# Altium PCB mainboard.PCBDOC
Units mm, origin at the board's own origin, x right, y up, seen from the top; angles counter-clockwise.
Board outline 295.53 x 164.72 mm, 2 copper layers (Top Layer, Bottom Layer); 48 components, 69 nets, 273 pads, 6 vias.
Unrouted connection lines stored in the file: 91.
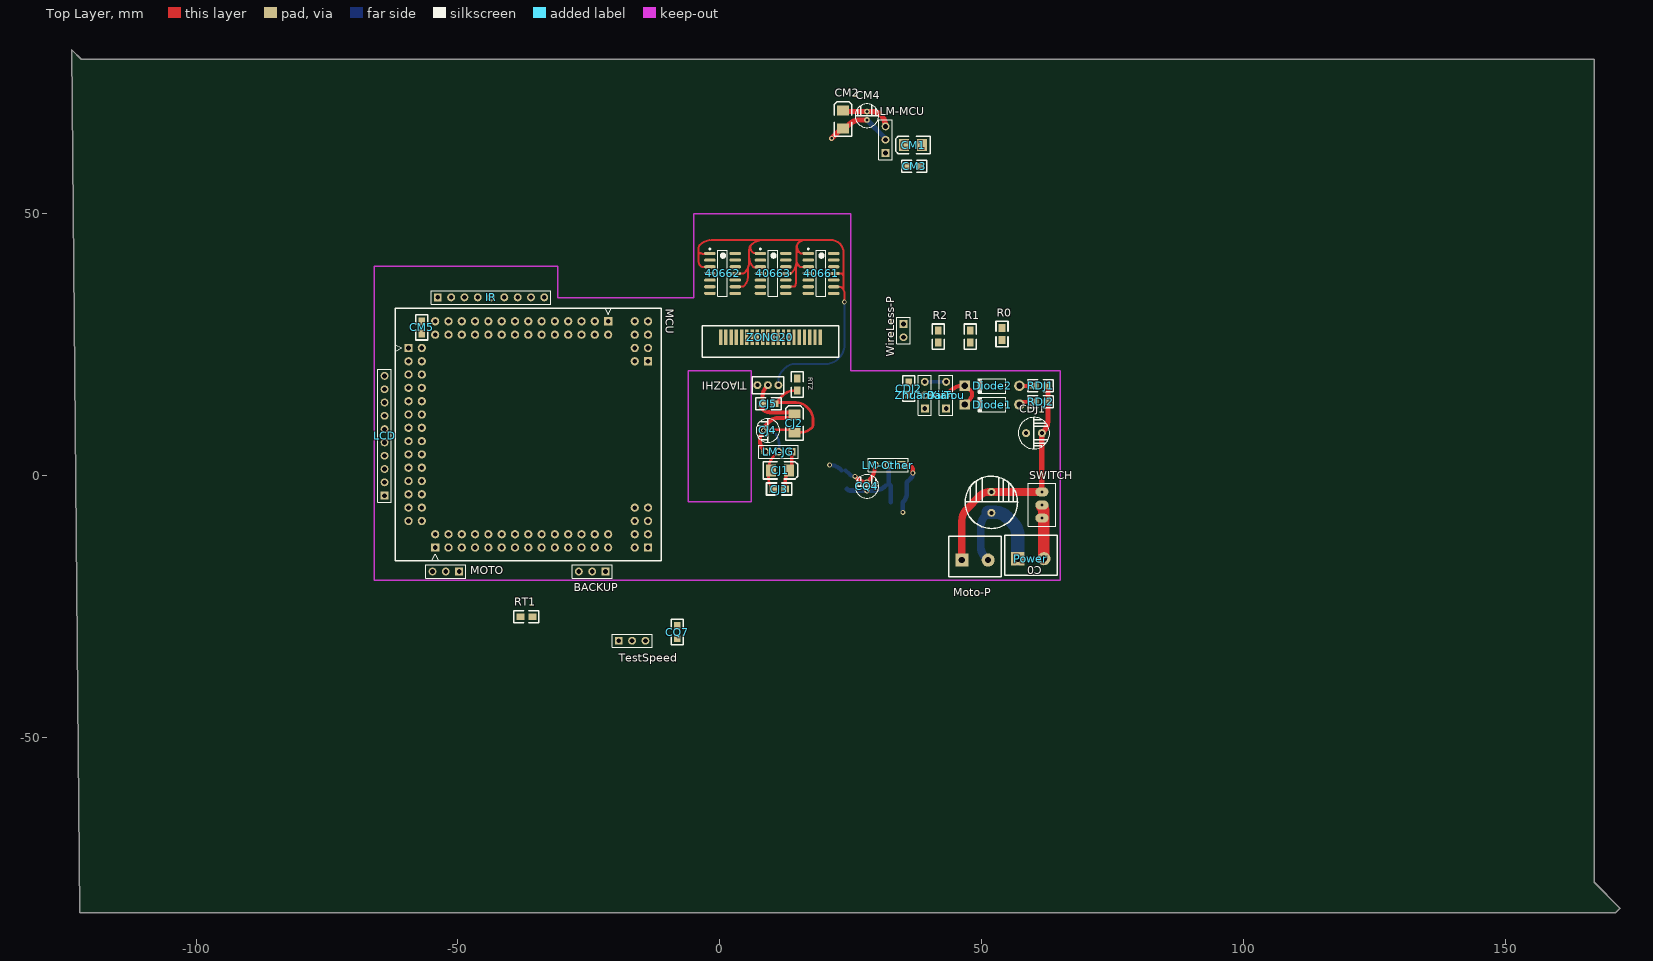
[diagram p0: Top Layer view]
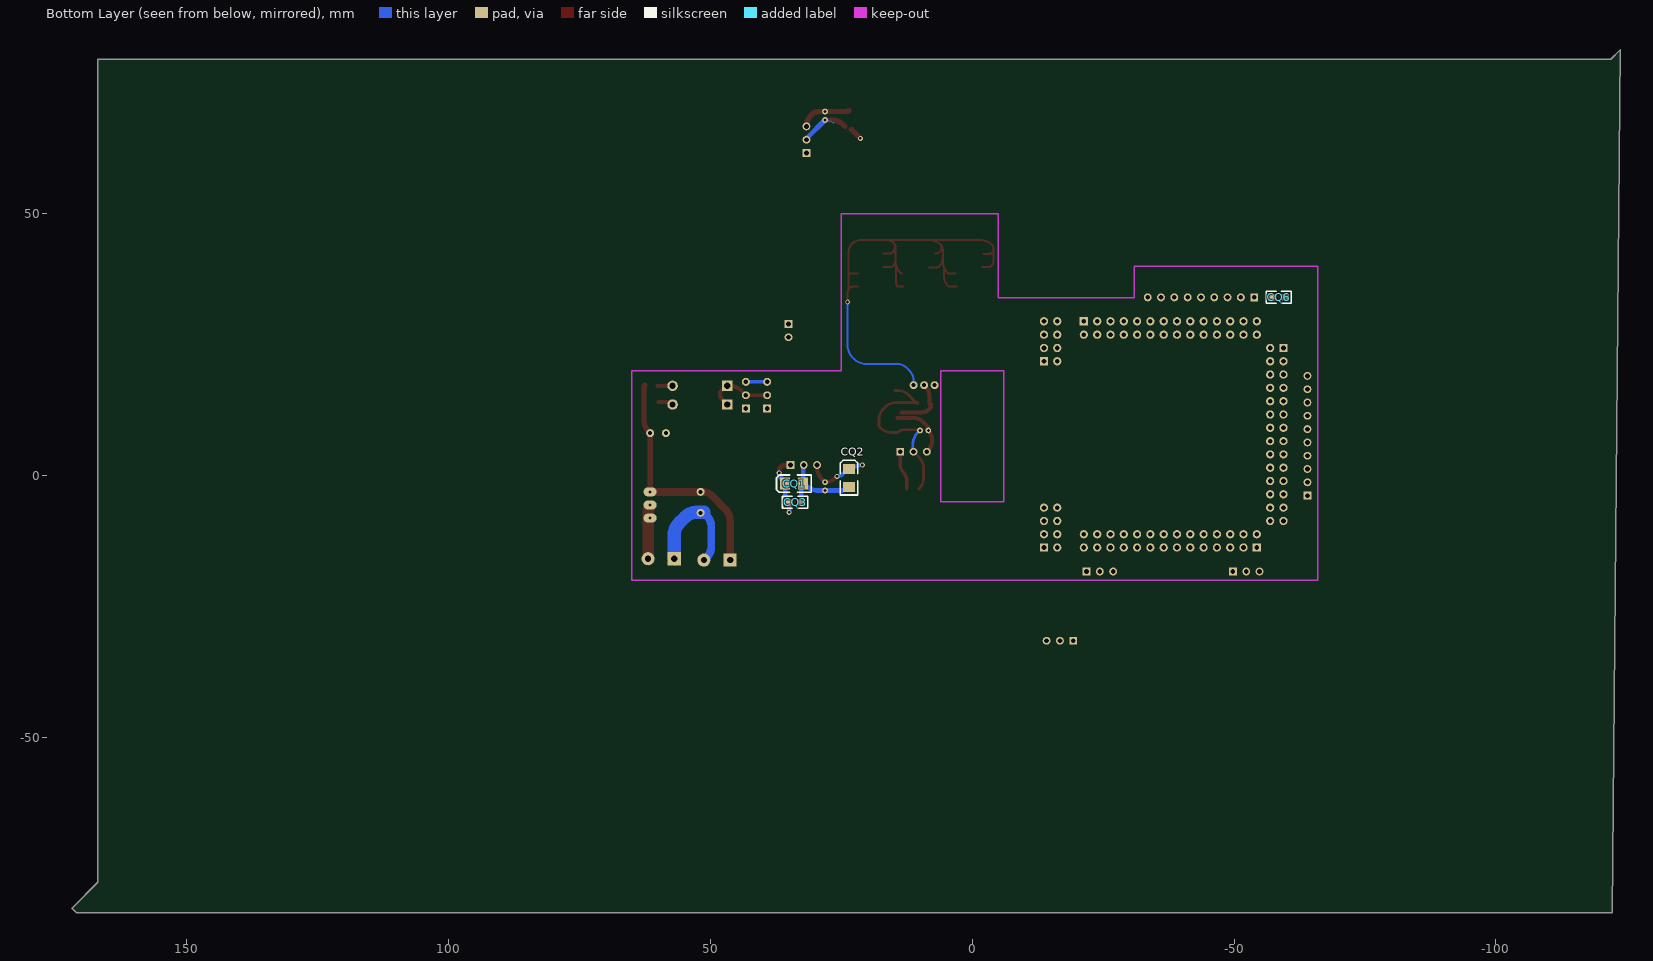
[diagram p1: Bottom Layer view, seen from below]

## Layer stack, top to bottom
Top Layer: signal copper 0.0356
Dielectric: dielectric 0.32, FR-4, Dk 4.8
Bottom Layer: signal copper 0.0356

## Board outline
-122.174,-83.439 170.942,-83.439 171.831,-82.55 166.878,-77.597 166.878,79.502 -121.92,79.502 -123.698,81.28

## Design rules (kind name [scope] priority, off if disabled: settings)
Clearance [All] p1: gap=0.254
ComponentClearance [All] p1 off: gap=0.254 collisioncheckmode=3 verticalgap=0.254
PolygonConnect [All] p1: connectstyle=Relief reliefconductorwidth=0.254 reliefentries=4 polygonreliefangle="90 Angle"
RoutingVias [All] p1: holewidth=0.711 width=1.27 viastyle="Through Hole" minholewidth=0.5 minwidth=0.7 maxholewidth=0.711 maxwidth=1.27
SolderMaskExpansion [All] p1: expansion=0.102
TestPointUsage [All] p1: valid=0 allowmultiple=FALSE
Testpoint [All] p1: side=15 testpointundercomponent=TRUE minsize=1.016 maxsize=2.54 preferedsize=1.524 minholesize=0 maxholesize=1.016 preferedholesize=0.813 testpointgrid=0.025 style=1023 order=0-112345678
Width [All] p1: maxlimit=2.5 minlimit=0.254 preferedwidth=0.254 toplayer_prefwidth=0.508 bottomlayer_prefwidth=0.508 minimp=50.000000 maximp=50.000000 favimp=50.000000
18 further rules are at their usual default settings.

## Classes and differential pairs
component class MCU: MCU
component class mainboard: BACKUP BaiTou C0 CDJ1 CDJ2 CJ1 CJ2 CJ3 CJ4 CJ5 CM1 CM2 CM3 CM4 CM5 CQ1 CQ2 CQ3 CQ4 CQ6 CQ7 Diode1 Diode2 IR LCD LM-JG LM-MCU LM-Other MOTO Moto-P Power R0 R1 R2 RDJ1 RDJ2 RT1 SWITCH TestSpeed WireLess-P ZhuanXian ZONG20
component class Control: 40661 40662 40663 RTZ TIAOZHI

## Components (designator, comment, footprint, x,y, rotation, side; value= is the part's Value field where it differs from the comment)
40661 "Header 7X2A" 4066SOP 19.304,38.608 r0 top
40662 "Header 7X2A" 4066SOP 0.508,38.608 r0 top
40663 "Header 7X2A" 4066SOP 10.16,38.608 r0 top
BACKUP "Header 3" HDR1X3 -21.844,-18.288 r180 top
BaiTou "激光摆头舵机接口" HDR1X3 43.18,12.827 r90 top
C0 "BATT" 1000UF 51.816,-5.08 r270 top
CDJ1 "100uF" 100UF 59.944,8.128 r180 top
CDJ2 "Cap" 0805 36.068,17.78 r270 top
CJ1 "Cap Pol3" 3528 13.208,1.016 r0 top
CJ2 "47uF" 3528 14.224,11.684 r90 top
CJ3 "Cap" 0805 10.16,-2.54 r0 top
CJ4 "47uF" 47UF 9.144,8.636 r0 top
CJ5 "Cap" 0805 8.128,13.716 r0 top
CM1 "Cap Pol3" 3528 35.179,63.119 r180 top
CM2 "47uF" 3528 23.495,69.723 r90 top
CM3 "Cap" 0805 38.227,59.055 r180 top
CM4 "47uF" 47UF 28.067,68.707 r270 top
CM5 "Cap" 0805 -56.896,29.464 r270 top
CQ1 "Cap Pol3" 3528 35.687,-1.524 r0 bottom
CQ2 "47uF" 3528 23.495,1.27 r90 bottom
CQ3 "Cap" 0805 32.639,-5.08 r0 bottom
CQ4 "47uF" 47UF 28.067,-2.032 r270 top
CQ6 "Cap" 0805 -57.404,34.036 r180 bottom
CQ7 "Cap" 0805 -8.128,-30.988 r90 top
Diode1 "Diode 1N4001" DO-41 51.943,13.589 r180 top
Diode2 "Diode 1N4001" DO-41 51.943,17.145 r180 top
IR "红外模块接口" HDR1X9 -53.848,34.036 r0 top
LCD "LCD显示接口" HDR1X10 -64.008,-3.81 r90 top
LM-JG "激光供电模块" HDR1X3 13.716,4.572 r180 top
LM-MCU "单片机供电模块" HDR1X3 31.623,61.595 r90 top
LM-Other "其他供电模块" HDR1X3 34.671,2.032 r180 top
MCU "龙丘单片机" LQ_112_BOARD -59.436,24.384 r0 top
MOTO "电机模块" HDR1X3 -49.784,-18.288 r180 top
Moto-P "电机电源" tongzhu 43.688,-19.304 r0 top
Power "电源" tongzhu 54.356,-19.05 r0 top
R0 "0欧姆" 0805 53.848,25.908 r90 top
R1 "0欧姆" 0805 47.752,25.4 r90 top
R2 "0欧姆" 0805 41.656,25.4 r90 top
RDJ1 "6欧姆" 0805 60.071,17.145 r0 top
RDJ2 "6欧姆" 0805 60.071,14.097 r0 top
RT1 "测速电阻" 0805 -38.1,-26.924 r0 top
RTZ "TIAO" 0805 14.732,16.256 r90 top
SWITCH "SWITCH" SWITCH 61.468,-5.588 r90 top
TestSpeed "测速模块" HDR1X3 -19.304,-31.496 r0 top
TIAOZHI "Header 3" TIAOZHI 9.144,17.272 r180 top
WireLess-P "无线电源模块" HDR1X2 35.052,28.956 r270 top
ZhuanXian "摆角舵机" HDR1X3 39.116,12.827 r90 top
ZONG20 "Header 20" ZONG20 9.144,26.416 r0 top

## Footprints (in the part's own frame and the unit in brackets; to place one, negate y for a bottom-side part, rotate by r counter-clockwise, add the part's x,y. Pads: shape width x height; smd on the part's side, far side on the other; paste and mask are expansions set on the pad)
47UF [mm]
  round 1.1 hole 0.6: 1(-0.8,0) 2(0.8,0)
  silkscreen extent -2.25,-2.25 2.25,2.25
100UF [mil]
  round 60 hole 30: 1(-59.06,0) 2(59.06,0)
  silkscreen extent -118,-118 118,118
0805 [mil]
  rect 60x50 smd: 1(0,0) 2(90,0)
  silkscreen extent -50,-45 140,45
1000UF [mil]
  round 60 hole 30: 1(-78.74,0) 2(78.74,0)
  silkscreen extent -197,-197 197,197
3528 [mil]
  rect 75x90 smd: 1(0,0) 2(-135,0)
  silkscreen extent -195,-65 65,65
4066SOP [mm] "SOP, 14-Leads, Body 8.8x4.0mm (max), Pitch 1.27mm, IPC Medium Density"
  oval 2.2x0.6 smd: 1(-2.425,3.81) 2(-2.425,2.54) 3(-2.425,1.27) 4(-2.425,0) 5(-2.425,-1.27) 6(-2.425,-2.54) 7(-2.425,-3.81) 8(2.425,-3.81) 9(2.425,-2.54) 10(2.425,-1.27) 11(2.425,0) 12(2.425,1.27) 13(2.425,2.54) 14(2.425,3.81)
  silkscreen extent -2.55,-4.4 0.93,4.78
DO-41 [mm] "Diode, Axial; Body 5.2 x 2.7 mm (LxDia. max), Lead Dia. 0.86 mm (max)"
  round 2 hole 1.2: 1(-5.23,0)
  rect 2x2 hole 1.2: 2(5.23,0)
  silkscreen extent -2.65,-1.42 2.75,1.4
HDR1X2 [mm] "Connector; Header; 2 Position"
  rect 1.5x1.5 hole 0.9: 1(0,0)
  round 1.5 hole 0.9: 2(2.54,0)
  silkscreen extent -1.27,-1.27 3.81,1.27
HDR1X3 [mm] "Connector; Header; 3 Position"
  rect 1.5x1.5 hole 0.9: 1(0,0)
  round 1.5 hole 0.9: 2(2.54,0) 3(5.08,0)
  silkscreen extent -1.27,-1.27 6.35,1.27
HDR1X9 [mm] "Connector; Header; 9 Position"
  rect 1.5x1.5 hole 0.9: 1(0,0)
  round 1.5 hole 0.9: 2(2.54,0) 3(5.08,0) 4(7.62,0) 5(10.16,0) 6(12.7,0) 7(15.24,0) 8(17.78,0) 9(20.32,0)
  silkscreen extent -1.27,-1.27 21.59,1.27
HDR1X10 [mm] "Connector; Header; 10 Position"
  rect 1.5x1.5 hole 0.9: 1(0,0)
  round 1.5 hole 0.9: 2(2.54,0) 3(5.08,0) 4(7.62,0) 5(10.16,0) 6(12.7,0) 7(15.24,0) 8(17.78,0) 9(20.32,0) 10(22.86,0)
  silkscreen extent -1.27,-1.27 24.13,1.27
LQ_112_BOARD [mil]
  rect 62x62 hole 35: 101(200,-1500) 201(0,0) 301(1500,200) 401(1800,-1500) 501(1800,-100)
  round 62 hole 35: 102(200,-1400) 103(300,-1500) 104(300,-1400) 105(400,-1500) 106(400,-1400) 107(500,-1500) 108(500,-1400) 109(600,-1500) 110(600,-1400) 111(700,-1500) 112(700,-1400) 113(800,-1500) 114(800,-1400) 115(900,-1500) 116(900,-1400) 117(1000,-1500) 118(1000,-1400) 119(1100,-1500) 120(1100,-1400) 121(1200,-1500) 122(1200,-1400) 123(1300,-1500) 124(1300,-1400) 125(1400,-1500) 126(1400,-1400) 127(1500,-1500) 128(1500,-1400) 202(100,0) 203(0,-100) 204(100,-100) 205(0,-200) 206(100,-200) 207(0,-300) 208(100,-300) 209(0,-400) 210(100,-400) 211(0,-500) 212(100,-500) 213(0,-600) 214(100,-600) 215(0,-700) 216(100,-700) 217(0,-800) 218(100,-800) 219(0,-900) 220(100,-900) 221(0,-1000) 222(100,-1000) 223(0,-1100) 224(100,-1100) 225(0,-1200) 226(100,-1200) 227(0,-1300) 228(100,-1300) 302(1500,100) 303(1400,200) 304(1400,100) 305(1300,200) 306(1300,100) 307(1200,200) 308(1200,100) 309(1100,200) 310(1100,100) 311(1000,200) 312(1000,100) 313(900,200) 314(900,100) 315(800,200) 316(800,100) 317(700,200) 318(700,100) 319(600,200) 320(600,100) 321(500,200) 322(500,100) 323(400,200) 324(400,100) 325(300,200) 326(300,100) 327(200,200) 328(200,100) 402(1700,-1500) 403(1800,-1400) 404(1700,-1400) 405(1800,-1300) 406(1700,-1300) 407(1800,-1200) 408(1700,-1200) 502(1700,-100) 503(1800,0) 504(1700,0) 505(1800,100) 506(1700,100) 507(1800,200) 508(1700,200)
  silkscreen extent -100,-1600 1900,300
SWITCH [mm]
  oval 1.7x2.5 hole 0.6: 1(-2.5,0) 2(0,0) 3(2.5,0)
  silkscreen extent -4.1,-2.6 4.1,2.6
TIAOZHI [mil]
  round 60 hole 30: 1(-78.74,0) 2(0,0) 3(78.74,0)
  silkscreen extent -118,-65 118,65
tongzhu [mm]
  rect 2.5x2.5 hole 1.2: 1(2.5,3.2)
  round 2.5 hole 1.2: 2(7.5,3.2)
  silkscreen extent 0,0 10,7.7
ZONG20 [mm]
  rect 0.65x3 smd: 1(-9,0) 2(-8,0) 3(-7,0) 4(-6,0) 5(-5,0) 6(-4,0) 7(-3,0) 8(-2,0) 9(-1,0) 10(0,0) 11(1,0) 12(2,0) 13(3,0) 14(4,0) 15(5,0) 16(6,0) 17(7,0) 18(8,0) 19(9,0) 20(10,0)
  silkscreen extent -12.5,-3.8 13.5,2.2

## Part data
40661 40662 40663: "40661"
BACKUP: "备用"
BaiTou LM-JG LM-MCU LM-Other MOTO SWITCH TestSpeed ZhuanXian: library part "Header 3", "Header, 3-Pin"
C0: library part "Cap Pol3", "Polarized Capacitor (Surface Mount)"
CDJ1 CJ2 CM2 CQ2: library part "Cap Pol1", "Polarized Capacitor (Radial)"
CDJ2 CJ3 CJ5 CM3 CM5 CQ3 CQ6 CQ7: "Capacitor"
CJ1 CM1 CQ1: "Polarized Capacitor (Surface Mount)"
CJ4 CM4 CQ4: library part Cap, "Capacitor"
Diode1 Diode2: "1 Amp General Purpose Rectifier"
IR: library part "Header 9", "Header, 9-Pin"
LCD: library part "Header 10", "Header, 10-Pin"
MCU: library part LQ_112_BOARD, "LQ_112_BOARD"
Moto-P Power WireLess-P: library part "Header 2", "Header, 2-Pin"
R0 R1 R2 RDJ1 RDJ2 RT1 RTZ: library part Res2, "Resistor"
TIAOZHI: "Header, 3-Pin"
ZONG20: "传感下来引脚"

## Via types
v1: diameter 0.965, hole 0.508, Top Layer to Bottom Layer, tented bottom, 5 vias
v2: diameter 0.9, hole 0.6, Top Layer to Bottom Layer, 1 vias

## Nets (pads, with @x,y where several pads share a name; then routed paths per layer and width w, separated by ;. In a path a pad name is that pad's centre, name@x,y a point inside that pad or via, vN(x,y) a via of type N, cw(c..) or ccw(c..) an arc to the next point about the centre after c; other vN are vias at no path point)
0: IR.9 MCU.309
1: IR.8 MCU.311
2: IR.7 MCU.313
3: IR.6 MCU.315
4: IR.5 MCU.317
5: IR.4 MCU.319
6: IR.3 MCU.321
8: MCU.310 ZONG20.10
9: MCU.312 ZONG20.9
10: MCU.314 ZONG20.8
11: MCU.316 ZONG20.7
-1: 40661.2 ZONG20.20
-2: 40661.4 ZONG20.19
-3: 40661.10 ZONG20.18
-4: 40661.8 ZONG20.17
-5: 40662.2 ZONG20.16
-6: 40662.4 ZONG20.15
-7: 40662.10 ZONG20.6
-8: 40662.8 ZONG20.5
-9: 40663.2 ZONG20.4
-10: 40663.4 ZONG20.3
-11: 40663.10 ZONG20.2
-12: 40663.8 ZONG20.1
A0: 40661.13 MCU.301
A1: 40661.5 MCU.302
A2: 40661.12 MCU.303
A3: 40661.6 MCU.304
A4: 40662.13 MCU.305
A5: 40662.5 MCU.306
A6: 40662.12 MCU.307
A7: 40662.6 MCU.308
ALLVCC: C0.1 CDJ1.1 CJ1.1 CJ3.2 CM1.1 CM3.2 CQ1.1 CQ3.2 LM-JG.1 LM-MCU.1 LM-Other.1 Moto-P.1 RDJ1.2 RDJ2.2 SWITCH.3 | length 65.4
  Top Layer w0.635: CJ3.2 12.446,-1.078 cw(c15.048,-1.078) 13.208,0.762 ccw(c11.982,1.988) 13.716,1.988 LM-JG.1
  Top Layer w0.889: LM-Other.1 35.656,2.032 cw(c35.656,0.731) 36.576,1.651 cw(c35.963,1.038) 36.83,1.038 v1(36.83,0.508)
  Top Layer w1: SWITCH.3 61.444,-3.088 CDJ1.1 61.713,8.397 ccw(c59.545,10.565) 62.611,10.565 62.611,16.965 ccw(c62.177,16.965) RDJ1.2@62.484,17.272
  Top Layer w1.27: C0.1@51.232,-3.088 cw(c51.232,-3.061) 51.213,-3.08 C0.1@51.308,-3.08 ; C0.1@51.268,-3.088 C0.1@51.268,-3.008 ; C0.1@51.308,-3.08 ccw(c51.327,-3.061) 51.327,-3.088 cw(c51.327,-3.061) C0.1@51.308,-3.08
  Top Layer w1.397: Moto-P.1 46.188,-8.549 cw(c49.254,-8.549) 47.086,-6.381 49.708,-3.759 cw(c51.327,-5.377) C0.1@51.327,-3.088
  Top Layer w1.524: C0.1@51.232,-3.088 SWITCH.3
  Bottom Layer w0.889: LM-Other.1 LM-Other.1@34.789,1.914 ; v1(34.925,-6.985) CQ3.2 ccw(c33.085,-3.24) 35.687,-3.24 CQ1.1 ; CQ1.1@35.687,-1.27 36.381,-0.576 ccw(c35.297,0.508) v1(36.83,0.508)
B0: 40663.13 MCU.121
B1: 40663.5 MCU.122
B2: 40663.12 MCU.123
B3: 40663.6 MCU.124
B4: BACKUP.3 MCU.125
B5: BACKUP.2 MCU.126
B6: BACKUP.1 MCU.127
B7: MCU.128 MOTO.1
DJVCC: BaiTou.2 CDJ2.2 Diode1.2 Diode2.2 ZhuanXian.2 | length 14.2
  Top Layer w0.635: ZhuanXian.2 BaiTou.2 cw(c43.793,15.367) BaiTou.2@43.36,15.801
  Top Layer w0.762: BaiTou.2 44.06,16.247 cw(c46.228,14.079) 46.228,17.145 Diode2.2 ; Diode2.2@46.205,16.637 Diode2.2 ; Diode1.2 47.7,14.576 ccw(c46.655,15.621) 48.133,15.621 ccw(c47.213,15.621) 47.864,16.271 47.186,16.949 ccw(c46.713,16.476) Diode2.2
FASHEVCC: ZONG20.14
GND: BaiTou.3 C0.2 CDJ1.2 CDJ2.1 Moto-P.2 Power.1 R0.2 R1.2 R2.2 WireLess-P.2 ZhuanXian.3 | length 26.9
  Bottom Layer w0.635: ZhuanXian.3 BaiTou.3
  Bottom Layer w0.787: BaiTou.3 BaiTou.3@43.18,18.034
  Bottom Layer w1.27: Moto-P.2@50.682,-15.63 Moto-P.2@51.308,-16.256 ; C0.2@51.146,-7.147 cw(c51.308,-7.309) C0.2@51.308,-7.08
  Bottom Layer w1.5: Moto-P.2@50.682,-15.63 cw(c52.85,-13.462) 49.784,-13.462 49.784,-9.779 cw(c52.85,-9.779) 50.682,-7.611 C0.2@51.146,-7.147
  Bottom Layer w2.5: C0.2@51.181,-6.985 52.578,-6.985 cw(c52.578,-10.051) 54.746,-7.883 55.958,-9.095 cw(c53.79,-11.263) 56.856,-11.263 Power.1
INVCC: Power.2 SWITCH.1 SWITCH.2 | length 10
  Top Layer w2.2: SWITCH.2@61.468,-5.969 cw(c60.531,-6.906) 61.856,-6.906 Power.2
JGND: 40661.7 40662.7 40663.7 CJ1.2 CJ2.2 CJ3.1 CJ4.2 CJ5.2 LM-JG.2 R1.1 RTZ.1 | length 36
  Top Layer w0.508: CJ4.2@9.779,8.763 12.998,8.763 cw(c12.998,7.029) CJ2.2 15.367,8.255 ccw(c15.367,11.321) 17.535,9.153 ccw(c16.944,9.744) 17.78,9.744 17.78,10.668 ccw(c14.714,10.668) 16.882,12.836 16.646,13.072 ccw(c14.478,10.904) 14.478,13.97 CJ5.2@10.414,13.97 ; CJ3.1 cw(c12.306,-0.394) 9.271,-0.394 9.271,1.397 cw(c12.337,1.397) 10.169,3.565 LM-JG.2 ; CJ5.2 12.056,15.358 cw(c14.224,13.19) 14.224,16.256 RTZ.1
  Bottom Layer w0.508: 10.405,8.175 cw(c8.237,6.007) 11.303,6.007 11.303,4.879 cw(c10.869,4.879) LM-JG.2
JIESHOUGND: ZONG20.13
JIESHOUVCC: ZONG20.11
JVCC: 40661.14 40662.14 40663.14 CJ2.1 CJ4.1 CJ5.1 LM-JG.3 TIAOZHI.2 | length 21.7
  Top Layer w0.762: CJ5.1@7.874,13.589 7.874,13.134 ccw(c8.308,13.134) 8.001,12.827 ccw(c9.841,14.667) 9.841,12.065 CJ2.1@13.462,12.065 ; CJ5.1 8.128,14.986 cw(c11.194,14.986) TIAOZHI.2@9.026,17.154 ; LM-JG.3 8.518,4.69 cw(c10.686,6.858) 7.62,6.858 7.62,6.888 cw(c10.092,6.888) CJ4.1 cw(c9.785,8.636) 8.766,9.655 9.262,10.151 cw(c11.43,7.983) 11.43,11.049 CJ2.1@14.224,11.049
M0: LCD.1 MCU.221
M1: LCD.2 MCU.222
M2: LCD.3 MCU.219
M3: LCD.4 MCU.220
M4: LCD.5 MCU.217
M5: LCD.6 MCU.218
M6: LCD.7 MCU.205
M7: LCD.8 MCU.206
MGND: CM1.2 CM2.2 CM3.1 CM4.2 CM5.2 LM-MCU.2 MCU.328 R0.1 | length 14
  Top Layer w1.016: v1(21.336,64.389) 22.897,65.95 cw(c23.114,65.733) CM2.2@23.114,66.04 ; CM2.2@24.257,66.675 24.591,67.009 cw(c26.759,64.841) 26.759,67.907 CM4.2 ; LM-MCU.2@31.369,64.135 LM-MCU.2
  Bottom Layer w0: 26.416,67.31 cw(c27.857,65.869) CM4.2@27.857,67.907
  Bottom Layer w1.016: CM4.2 31.47,64.504 cw(c31.102,64.135) LM-MCU.2 cw(c31.623,64.442) LM-MCU.2@31.406,64.225
MVCC: CM2.1 CM4.1 CM5.1 LM-MCU.3 MCU.327 WireLess-P.1 | length 10.5
  Top Layer w1.016: MCU.327@-54.663,29.591 cw(c-54.663,29.157) MCU.327 MCU.327@-54.654,29.464 ; CM2.1 ccw(c24.016,70.244) 24.016,69.507 29.122,69.507 cw(c29.122,67.24) 30.725,68.843 cw(c28.557,66.675) LM-MCU.3
NetDiode1_1: Diode1.1 RDJ2.1 | length 2.1
  Top Layer w0.762: Diode1.1@57.681,14.097 RDJ2.1@59.817,14.097
NetDiode2_1: Diode2.1 RDJ1.1 | length 3.2
  Top Layer w0.762: Diode2.1@56.896,17.145 RDJ1.1
NetRT1_1: RT1.1 TestSpeed.1
OUT: 40661.1 40661.3 40661.9 40661.11 40662.1 40662.3 40662.9 40662.11 40663.1 40663.3 40663.9 40663.11 RTZ.2 TIAOZHI.1 | length 118.7
  Top Layer w0.381: -4.064,42.418 -3.981,42.418 ccw(c-3.981,42.843) -3.68,42.542 ccw(c-3.074,43.149) -3.074,42.291 40662.1@-2.159,42.291 ; 40662.3 -3.376,39.878 cw(c-3.376,40.312) -3.683,40.005 cw(c-2.763,40.925) -4.064,40.925 -4.064,43.469 cw(c-3.228,43.469) -3.819,44.06 cw(c-1.651,41.892) -1.651,44.958 21.327,44.958 cw(c21.327,42.79) 22.86,44.323 cw(c21.02,42.483) 23.622,42.483 23.622,35.486 ; 40662.9 4.265,36.068 ccw(c4.265,36.502) 4.572,36.195 ccw(c2.732,38.035) 5.334,38.035 5.334,39.624 ; 40662.11@3.175,38.608 4.392,38.608 ccw(c4.392,39.042) 4.699,38.735 ccw(c2.553,40.881) 5.588,40.881 ; 5.588,40.386 5.588,43.162 cw(c6.858,43.162) 5.96,44.06 ; 5.588,41.718 ccw(c8.19,41.718) 6.35,39.878 ccw(c6.657,40.185) 6.657,39.751 40663.3@8.255,39.751 ; 40663.1@6.985,42.418 cw(c6.985,43.644) 6.118,42.777 cw(c6.784,43.443) 5.842,43.443 5.842,43.775 cw(c6.245,43.775) 5.96,44.06 ; 8.128,44.958 ccw(c8.128,41.892) 5.96,44.06 ; 40663.9@13.081,36.068 14.224,36.068 ccw(c13.611,36.681) 14.478,36.681 14.478,39.878 ; 40663.11@13.422,38.608 ccw(c13.422,39.011) 13.707,38.726 ccw(c11.539,40.894) 14.605,40.894 14.605,43.53 cw(c15.906,43.53) 14.985,44.449 ccw(c15.599,43.837) 14.732,43.837 14.732,43.771 ccw(c16.466,43.771) 15.24,42.545 ccw(c15.547,42.852) 15.547,42.418 40661.1 ; 14.605,40.132 14.859,40.132 ; 14.605,41.411 ccw(c16.773,41.411) 15.24,39.878 40661.3 ; 14.679,42.672 ccw(c14.679,43.106) 14.986,42.799 ; 14.986,44.45 cw(c16.212,43.224) 16.212,44.958 ; 40661.9 22.755,36.068 cw(c22.755,35.201) 23.368,35.814 cw(c22.448,34.894) 23.623,35.452 cw(c22.448,34.894) 23.749,34.894 v2(23.749,33.147) ; 40661.11 23.061,38.608 cw(c23.061,38.174) 23.368,38.481 cw(c22.755,37.868) 23.622,37.868
  Bottom Layer w0.381: TIAOZHI.1 11.144,18.002 cw(c14.21,18.002) 12.042,20.17 12.31,20.438 cw(c14.478,18.27) 14.478,21.336 20.32,21.336 ccw(c20.32,24.402) 22.488,22.234 22.851,22.597 ccw(c20.683,24.765) 23.749,24.765 v2(23.749,33.147)
PWM1: MCU.103 MOTO.2
PWM2: MCU.101 MOTO.3
PWM3: BaiTou.1 MCU.227
PWM4: MCU.225 ZhuanXian.1
QGND: CQ1.2 CQ2.2 CQ3.1 CQ4.2 CQ6.2 CQ7.1 IR.2 LM-Other.2 R2.1 TestSpeed.3 | length 15
  Bottom Layer w0.889: CQ2.2@24.257,-2.54 ccw(c24.962,-1.835) 24.962,-2.832 29.426,-2.832 ccw(c29.426,0.234) CQ1.2@31.594,-1.934 ; LM-Other.2 32.258,1.905 CQ1.2 32.639,-1.905 CQ3.1
QVCC: CQ2.1 CQ4.1 CQ6.1 CQ7.2 IR.1 LM-Other.3 TestSpeed.2 | length 11.3
  Top Layer w0.762: v1(25.781,-0.127) 26.051,-0.397 ccw(c28.067,1.619) CQ4.1 ; CQ4.1@27.875,-1.205 ccw(c27.939,-1.141) 27.939,-1.232 CQ4.1 ; LM-Other.3 29.591,1.562 cw(c26.525,1.562) 28.693,-0.606 CQ4.1
  Bottom Layer w0.762: v1(20.955,2.032) cw(c20.955,-1.034) 23.123,1.134 CQ2.1@23.241,1.016 ; CQ2.1@24.003,1.016 24.697,0.322 ccw(c25.781,1.406) v1(25.781,-0.127)
T0: MCU.109 RT1.2
pads on no net: LCD.9 LCD.10 MCU.102 MCU.104 MCU.105 MCU.106 MCU.107 MCU.108 MCU.110 MCU.111 MCU.112 MCU.113 MCU.114 MCU.115 MCU.116 MCU.117 MCU.118 MCU.119 MCU.120 MCU.201 MCU.202 MCU.203 MCU.204 MCU.207 MCU.208 MCU.209 MCU.210 MCU.211 MCU.212 MCU.213 MCU.214 MCU.215 MCU.216 MCU.223 MCU.224 MCU.226 MCU.228 MCU.318 MCU.320 MCU.322 MCU.323 MCU.324 MCU.325 MCU.326 MCU.401 MCU.402 MCU.403 MCU.404 MCU.405 MCU.406 MCU.407 MCU.408 MCU.501 MCU.502 MCU.503 MCU.504 MCU.505 MCU.506 MCU.507 MCU.508 TIAOZHI.3 ZONG20.12

## Keep-outs
Keep-Out Layer:
  lines w0.254: -66,-20 -66,40 -31,40 -31,34 -5,34 -5,40 -5,50 25,50 25,20 65,20 65,-20 -66,-20 ; -6,-5 -6,20 6,20 6,-5 -6,-5

## Silkscreen, mask and mechanical layers (free items; w line width, h text height)
Top Paste:
  lines w0.254: 145.542,-78.867 145.542,78.232 ; 166.878,79.502 -121.92,79.502 -123.698,81.28 -122.174,-83.439 170.942,-83.439